# EAGLE board das48 (EAGLE 9.6.2), part 1 of 2
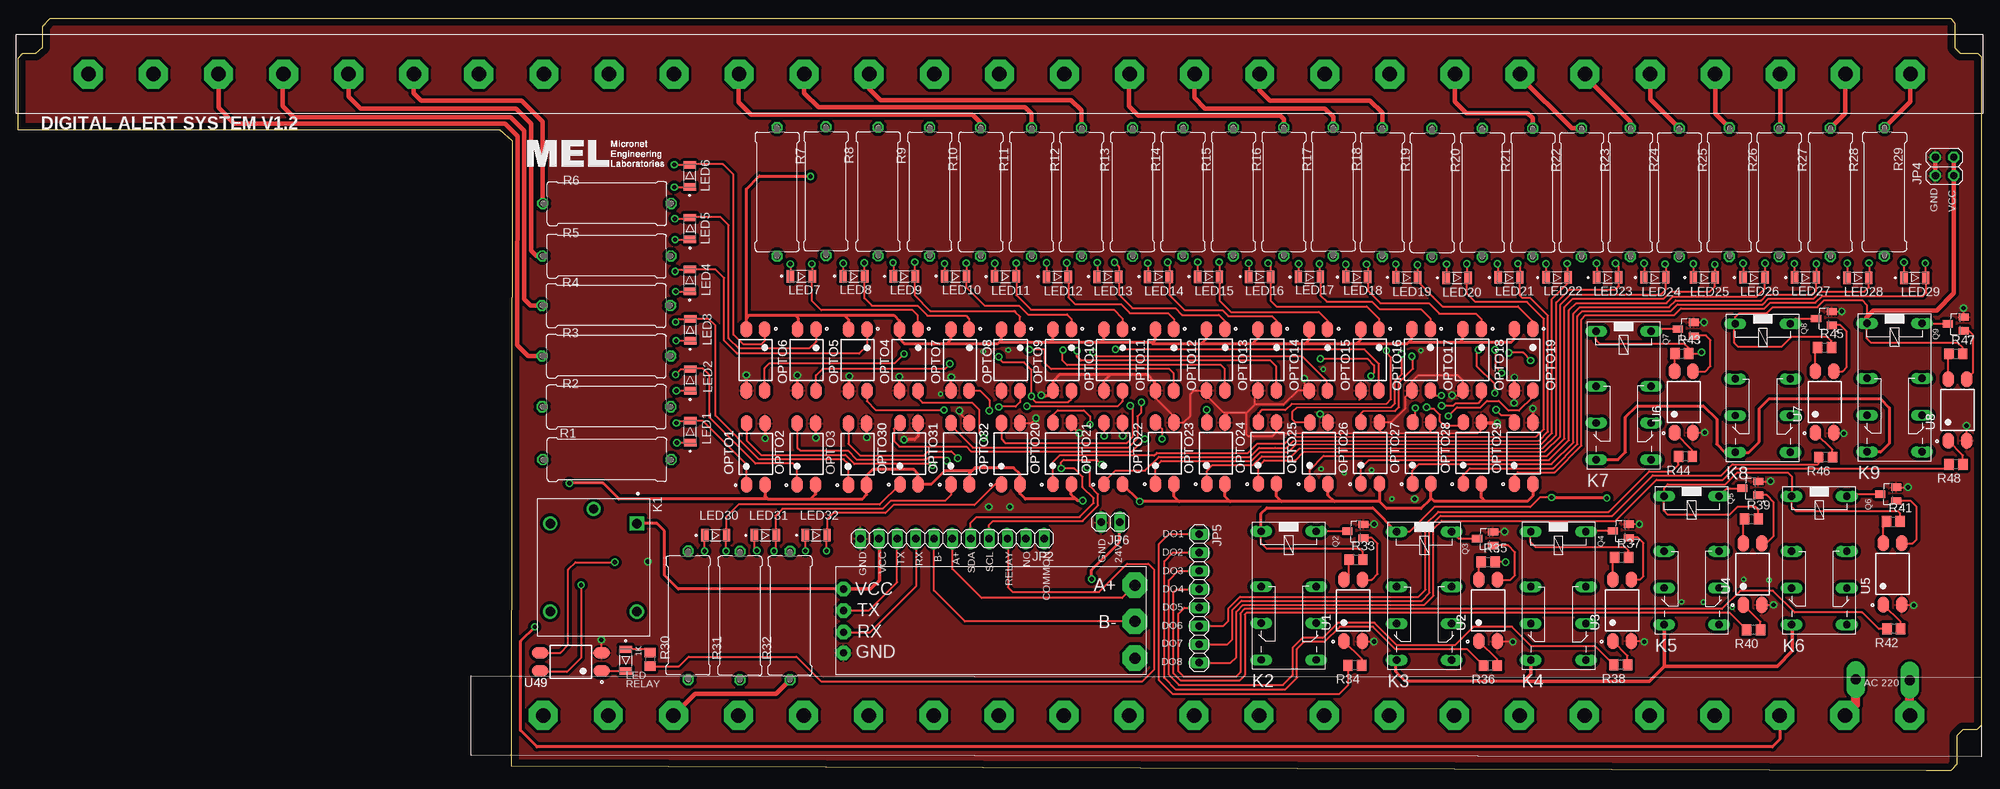
[diagram p0: board, top side]
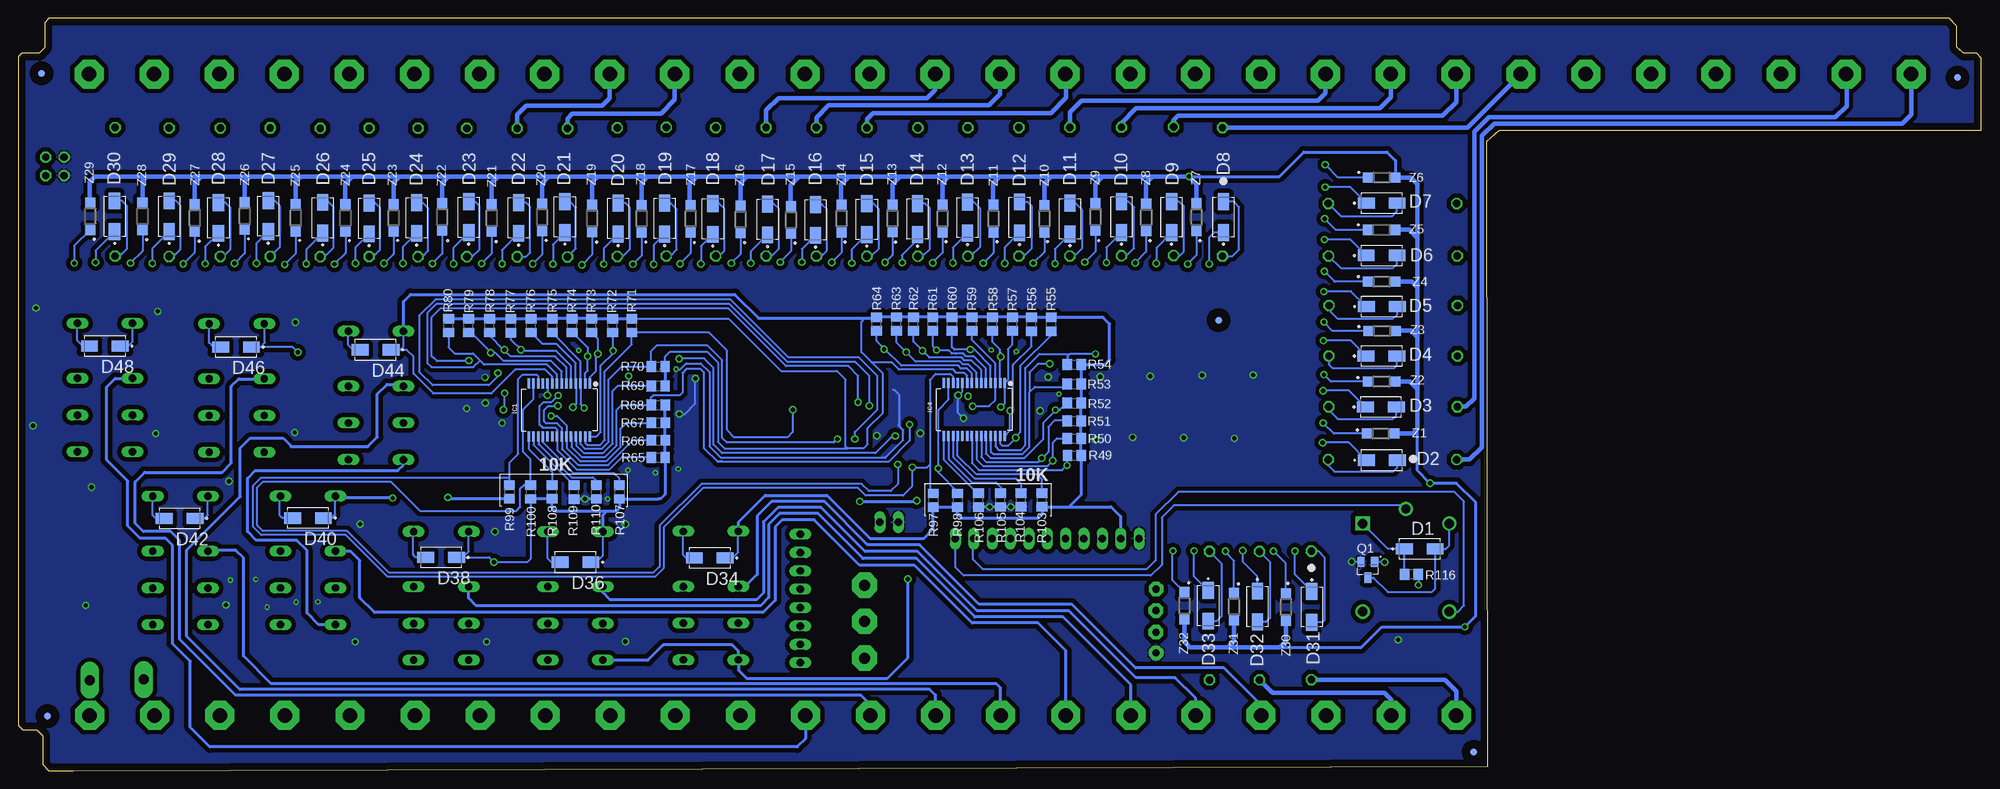
[diagram p1: board, bottom side, seen from below]

Size 271.53 x 104.12 mm. Coordinates in mm from the lower left corner, seen from the top.
Outline: 0.01,88.6 0,97.18 0.01,98.6 0.67,99.26 2.42,99.26 3.4,100.11 3.41,102.98 4.42,104.12 6.94,104.12 264.15,104.12 267.26,104.12 267.87,103.39 267.87,100.03 268.62,99.28 271.02,99.28 271.53,98.77 271.53,96.75 271.53,6.29 270.9,5.67 268.97,5.67 268.14,4.82 268.14,0.86 267.28,0 263.89,0 263.89,0 68.27,0.57 68.37,87.09 66.67,88.6 0.01,88.6
Copper layers (1*16): Top 0.035mm / dielectric 1.5mm / Bottom 0.035mm
Design rules "default *": minimum track width 6mil, minimum drill 0.3mm, track to track 6mil, track to pad 6mil, pad to pad 6mil, via to via 6mil, smd to smd 6mil, copper to edge 40mil, drill to drill 6mil, minimum pad ring 10mil, minimum via ring 8mil, stop-mask expansion 4mil, vias tented up to drill 0mil, thermal gap 10mil
Net classes: 0 default: drill 0.6 mm, clearance 0.3 mm

## Footprints (pad centres in the part's own frame; a part is rotated, then mirrored left to right if it is on the bottom)
DIOM5226X240N = smd 2.33 x 1.55: A 2.135,0; C -2.135,0
LEDC3216X120N = smd 1.01 x 1.73: + -1.51,0; - 1.51,0
HEADER-29P = drill 2 pad 4 octagon: 1 -109,16.5; 2 -100,16.5; 3 -91,16.5; 4 -82,16.5; 5 -73,16.5; 6 -64,16.5; 7 -55,16.5; 8 -46,16.5; 9 -37,16.5; 10 -28,16.5; 11 -19,16.5; 12 -10,16.5; 13 -1,16.5; 14 8,16.5; 15 17,16.5; 16 26,16.5; 17 35,16.5; 18 44,16.5; 19 53,16.5; 20 62,16.5; 21 71,16.5; 22 80,16.5
HEADER-29P' = drill 2 pad 4 octagon: 1 -116.62,5.07; 2 -107.62,5.07; 3 -98.62,5.07; 4 -89.62,5.07; 5 -80.62,5.07; 6 -71.62,5.07; 7 -62.62,5.07; 8 -53.62,5.07; 9 -44.62,5.07; 10 -35.62,5.07; 11 -26.62,5.07; 12 -17.62,5.07; 13 -8.62,5.07; 14 0.38,5.07; 15 9.38,5.07; 16 18.38,5.07; 17 27.38,5.07; 18 36.38,5.07; 19 45.38,5.07; 20 54.38,5.07; 21 63.38,5.07; 22 72.38,5.07; 23 81.38,5.07; 24 90.38,5.07; 25 99.38,5.07; 26 108.38,5.07; 27 117.38,5.07; 28 126.38,5.07; 29 135.38,5.07
SSOP28DB = smd 0.348 x 1.397: 1 -4.225,-3.656; 2 -3.575,-3.656; 3 -2.925,-3.656; 4 -2.275,-3.656; 5 -1.625,-3.656; 6 -0.975,-3.656; 7 -0.325,-3.656; 8 0.325,-3.656; 9 0.975,-3.656; 10 1.625,-3.656; 11 2.275,-3.656; 12 2.925,-3.656; 13 3.575,-3.656; 14 4.225,-3.656; 15 4.225,3.656; 16 3.575,3.656; 17 2.925,3.656; 18 2.275,3.656; 19 1.625,3.656; 20 0.975,3.656; 21 0.325,3.656; 22 -0.325,3.656; 23 -0.975,3.656; 24 -1.625,3.656; 25 -2.275,3.656; 26 -2.925,3.656; 27 -3.575,3.656; 28 -4.225,3.656
1X1-BIGPOGO = drill 1.4 pad 2.54 long: P$1 0,0
1X11 = drill 1.016 long: 1 -12.7,0; 2 -10.16,0; 3 -7.62,0; 4 -5.08,0; 5 -2.54,0; 6 0,0; 7 2.54,0; 8 5.08,0; 9 7.62,0; 10 10.16,0; 11 12.7,0
2X02 = drill 1.016 octagon: 1 -1.27,-1.27; 2 -1.27,1.27; 3 1.27,-1.27; 4 1.27,1.27
1X08 = drill 1.016 long: 1 -8.89,0; 2 -6.35,0; 3 -3.81,0; 4 -1.27,0; 5 1.27,0; 6 3.81,0; 7 6.35,0; 8 8.89,0
1X02 = drill 1.016 long: 1 -1.27,0; 2 1.27,0
RELAY_SRD-05VDC-SL-C = drill 1.32 square: A1 -6.1,6 | drill 1.32: A2 -6.1,-6; NC 6.1,6; NO 6.1,-6 | drill 1.29: COM -8.1,0
351 = drill 1.016 long: 1 -3.81,-3.81; 16 -3.81,3.81; O1 8.89,-3.81; O2 8.89,3.81; P1 3.81,-3.81; P2 3.81,3.81; S1 13.97,-3.81; S2 13.97,3.81
SOT254P975X400-4N = smd 2.25 x 1.6: 1 -4.25,1.27; 2 -4.25,-1.27; 3 4.25,-1.27; 4 4.25,1.27
SOT95P240X120-3N = smd 1 x 1.4: 1 -0.95,-1.1; 2 0.95,-1.1; 3 0,1.1
0617/17 = drill 1.016 octagon: 1 -8.89,0; 2 8.89,0
R0805 = smd 1.3 x 1.5: 1 -0.95,0; 2 0.95,0
TTL-RS485 = drill 1.5 pad 3.5 octagon: A -19.7,-6; B -19.7,-1; P$7 -19.7,4.1 | drill 1 pad 2 octagon: GND 20.6,3.37; RX 20.581,0.505; TX 20.583,-2.493; VCC 20.6,-5.47
FIDUCIAL_1MM = smd 1 x 1: 1 0,0
SOD123 = smd 1.4 x 1.4: A 1.9,0; C -1.9,0

## Placement (x,y rotation side)
D1  US1M-13  [DIOM5226X240N]  77.68,30.68 0 bottom
D2  US1M-13  [DIOM5226X240N]  82.93,42.95 0 bottom
D3  US1M-13  [DIOM5226X240N]  83.06,50.31 0 bottom
D4  US1M-13  [DIOM5226X240N]  82.97,57.38 0 bottom
D5  US1M-13  [DIOM5226X240N]  82.93,64.19 0 bottom
D6  US1M-13  [DIOM5226X240N]  82.95,71.28 0 bottom
D7  US1M-13  [DIOM5226X240N]  82.95,78.53 0 bottom
D8  US1M-13  [DIOM5226X240N]  104.81,76.59 90 bottom
D9  US1M-13  [DIOM5226X240N]  111.99,76.58 90 bottom
D10  US1M-13  [DIOM5226X240N]  118.94,76.59 90 bottom
D11  US1M-13  [DIOM5226X240N]  126.06,76.37 90 bottom
D12  US1M-13  [DIOM5226X240N]  133.02,76.55 90 bottom
D13  US1M-13  [DIOM5226X240N]  140.22,76.51 90 bottom
D14  US1M-13  [DIOM5226X240N]  147.16,76.32 90 bottom
D15  US1M-13  [DIOM5226X240N]  154.16,76.3 90 bottom
D16  US1M-13  [DIOM5226X240N]  161.23,76.2 90 bottom
D17  US1M-13  [DIOM5226X240N]  167.87,76.27 90 bottom
D18  US1M-13  [DIOM5226X240N]  175.46,76.34 90 bottom
D19  US1M-13  [DIOM5226X240N]  182.1,76.39 90 bottom
D20  US1M-13  [DIOM5226X240N]  188.54,76.39 90 bottom
D21  US1M-13  [DIOM5226X240N]  195.91,76.59 90 bottom
D22  US1M-13  [DIOM5226X240N]  202.3,76.48 90 bottom
D23  US1M-13  [DIOM5226X240N]  209.2,76.58 90 bottom
D24  US1M-13  [DIOM5226X240N]  216.41,76.47 90 bottom
D25  US1M-13  [DIOM5226X240N]  222.99,76.39 90 bottom
D26  US1M-13  [DIOM5226X240N]  229.41,76.5 90 bottom
D27  US1M-13  [DIOM5226X240N]  236.92,76.72 90 bottom
D28  US1M-13  [DIOM5226X240N]  243.82,76.46 90 bottom
D29  US1M-13  [DIOM5226X240N]  250.61,76.7 90 bottom
D30  US1M-13  [DIOM5226X240N]  258.19,76.7 90 bottom
D31  US1M-13  [DIOM5226X240N]  92.61,22.66 270 bottom
D32  US1M-13  [DIOM5226X240N]  100.14,22.7 270 bottom
D33  US1M-13  [DIOM5226X240N]  106.94,22.82 270 bottom
D34  US1M-13  [DIOM5226X240N]  175.88,29.42 180 bottom
D36  US1M-13  [DIOM5226X240N]  194.45,28.85 180 bottom
D38  US1M-13  [DIOM5226X240N]  213.02,29.52 180 bottom
D40  US1M-13  [DIOM5226X240N]  231.44,34.94 180 bottom
D42  US1M-13  [DIOM5226X240N]  249.18,34.9 180 bottom
D44  US1M-13  [DIOM5226X240N]  222.09,58.23 180 bottom
D46  US1M-13  [DIOM5226X240N]  241.4,58.61 180 bottom
D48  US1M-13  [DIOM5226X240N]  259.53,58.76 180 bottom
D146  LHN974_RED_LED_1206  [LEDC3216X120N]  84.02,15.28 270 top
HEADER-22P1  [HEADER-29P]  181.64,-8.86 0 top
HEADER-29P1  [HEADER-29P']  126.33,91.31 0 top
IC1  MCP23017SS  [SSOP28DB]  196.68,49.91 180 bottom
IC4  MCP23017SS  [SSOP28DB]  139.3,49.98 180 bottom
JP1  [1X1-BIGPOGO]  261.62,12.52 90 top
JP2  [1X11]  129.21,32.11 180 top
JP3  [1X1-BIGPOGO]  254.15,12.62 90 top
JP4  [2X02]  266.44,83.6 90 top
JP5  [1X08]  163.35,23.82 270 top
JP6  [1X02]  151.07,34.37 180 top
K1  SRD-05VDC-SL-C  [RELAY_SRD-05VDC-SL-C]  79.59,28.1 270 top
K2  351  [351]  175.73,29.29 270 top
K3  351  [351]  194.46,29.25 270 top
K4  351  [351]  213.02,29.26 270 top
K5  351  [351]  231.46,34.17 270 top
K6  351  [351]  249.1,34.16 270 top
K7  351  [351]  222.05,56.99 270 top
K8  351  [351]  241.3,58.03 270 top
K9  351  [351]  259.52,58.08 270 top
LED1  LHN974_RED_LED_1206  [LEDC3216X120N]  92.94,46.89 90 top
LED2  LHN974_RED_LED_1206  [LEDC3216X120N]  92.95,54.06 90 top
LED3  LHN974_RED_LED_1206  [LEDC3216X120N]  92.95,61 90 top
LED4  LHN974_RED_LED_1206  [LEDC3216X120N]  92.89,67.83 90 top
LED5  LHN974_RED_LED_1206  [LEDC3216X120N]  92.92,75.01 90 top
LED6  LHN974_RED_LED_1206  [LEDC3216X120N]  92.88,82.29 90 top
LED7  LHN974_RED_LED_1206  [LEDC3216X120N]  108.31,68.42 0 top
LED8  LHN974_RED_LED_1206  [LEDC3216X120N]  115.61,68.41 0 top
LED9  LHN974_RED_LED_1206  [LEDC3216X120N]  122.56,68.39 0 top
LED10  LHN974_RED_LED_1206  [LEDC3216X120N]  129.65,68.4 0 top
LED11  LHN974_RED_LED_1206  [LEDC3216X120N]  136.56,68.36 0 top
LED12  LHN974_RED_LED_1206  [LEDC3216X120N]  143.74,68.33 0 top
LED13  LHN974_RED_LED_1206  [LEDC3216X120N]  150.73,68.34 0 top
LED14  LHN974_RED_LED_1206  [LEDC3216X120N]  157.7,68.34 0 top
LED15  LHN974_RED_LED_1206  [LEDC3216X120N]  164.64,68.34 0 top
LED16  LHN974_RED_LED_1206  [LEDC3216X120N]  171.72,68.34 0 top
LED17  LHN974_RED_LED_1206  [LEDC3216X120N]  178.59,68.29 0 top
LED18  LHN974_RED_LED_1206  [LEDC3216X120N]  185.15,68.3 0 top
LED19  LHN974_RED_LED_1206  [LEDC3216X120N]  192.07,68.25 0 top
LED20  LHN974_RED_LED_1206  [LEDC3216X120N]  199.02,68.19 0 top
LED21  LHN974_RED_LED_1206  [LEDC3216X120N]  206.18,68.23 0 top
LED22  LHN974_RED_LED_1206  [LEDC3216X120N]  212.85,68.23 0 top
LED23  LHN974_RED_LED_1206  [LEDC3216X120N]  219.83,68.24 0 top
LED24  LHN974_RED_LED_1206  [LEDC3216X120N]  226.37,68.25 0 top
LED25  LHN974_RED_LED_1206  [LEDC3216X120N]  233.19,68.24 0 top
LED26  LHN974_RED_LED_1206  [LEDC3216X120N]  240.08,68.22 0 top
LED27  LHN974_RED_LED_1206  [LEDC3216X120N]  247.18,68.24 0 top
LED28  LHN974_RED_LED_1206  [LEDC3216X120N]  254.45,68.21 0 top
LED29  LHN974_RED_LED_1206  [LEDC3216X120N]  262.33,68.18 0 top
LED30  LHN974_RED_LED_1206  [LEDC3216X120N]  96.48,32.57 0 top
LED31  LHN974_RED_LED_1206  [LEDC3216X120N]  103.35,32.57 0 top
LED32  LHN974_RED_LED_1206  [LEDC3216X120N]  110.38,32.58 0 top
OPTO1  PC817X2NIP0F  [SOT254P975X400-4N]  102.03,43.8 90 top
OPTO2  PC817X2NIP0F  [SOT254P975X400-4N]  109.03,43.81 90 top
OPTO3  PC817X2NIP0F  [SOT254P975X400-4N]  116.09,43.78 90 top
OPTO4  PC817X2NIP0F  [SOT254P975X400-4N]  116.11,56.81 270 top
OPTO5  PC817X2NIP0F  [SOT254P975X400-4N]  109.06,56.81 270 top
OPTO6  PC817X2NIP0F  [SOT254P975X400-4N]  101.99,56.83 270 top
OPTO7  PC817X2NIP0F  [SOT254P975X400-4N]  123.18,56.82 270 top
OPTO8  PC817X2NIP0F  [SOT254P975X400-4N]  130.27,56.82 270 top
OPTO9  PC817X2NIP0F  [SOT254P975X400-4N]  137.31,56.82 270 top
OPTO10  PC817X2NIP0F  [SOT254P975X400-4N]  144.39,56.82 270 top
OPTO11  PC817X2NIP0F  [SOT254P975X400-4N]  151.47,56.82 270 top
OPTO12  PC817X2NIP0F  [SOT254P975X400-4N]  158.55,56.82 270 top
OPTO13  PC817X2NIP0F  [SOT254P975X400-4N]  165.63,56.83 270 top
OPTO14  PC817X2NIP0F  [SOT254P975X400-4N]  172.74,56.83 270 top
OPTO15  PC817X2NIP0F  [SOT254P975X400-4N]  179.83,56.83 270 top
OPTO16  PC817X2NIP0F  [SOT254P975X400-4N]  186.95,56.83 270 top
OPTO17  PC817X2NIP0F  [SOT254P975X400-4N]  194.03,56.84 270 top
OPTO18  PC817X2NIP0F  [SOT254P975X400-4N]  201.11,56.85 270 top
OPTO19  PC817X2NIP0F  [SOT254P975X400-4N]  208.19,56.85 270 top
OPTO20  PC817X2NIP0F  [SOT254P975X400-4N]  144.39,43.88 90 top
OPTO21  PC817X2NIP0F  [SOT254P975X400-4N]  151.47,43.88 90 top
OPTO22  PC817X2NIP0F  [SOT254P975X400-4N]  158.6,43.91 90 top
OPTO23  PC817X2NIP0F  [SOT254P975X400-4N]  165.66,43.92 90 top
OPTO24  PC817X2NIP0F  [SOT254P975X400-4N]  172.78,43.96 90 top
OPTO25  PC817X2NIP0F  [SOT254P975X400-4N]  179.91,43.93 90 top
OPTO26  PC817X2NIP0F  [SOT254P975X400-4N]  187.01,43.96 90 top
OPTO27  PC817X2NIP0F  [SOT254P975X400-4N]  194.14,43.96 90 top
OPTO28  PC817X2NIP0F  [SOT254P975X400-4N]  201.14,43.95 90 top
OPTO29  PC817X2NIP0F  [SOT254P975X400-4N]  208.22,43.92 90 top
OPTO30  PC817X2NIP0F  [SOT254P975X400-4N]  123.22,43.86 90 top
OPTO31  PC817X2NIP0F  [SOT254P975X400-4N]  130.28,43.85 90 top
OPTO32  PC817X2NIP0F  [SOT254P975X400-4N]  137.29,43.84 90 top
Q1  S9013  [SOT95P240X120-3N]  84.87,27.8 180 bottom
Q2  S9013  [SOT95P240X120-3N]  184.96,33.12 90 top
Q3  S9013  [SOT95P240X120-3N]  202.89,32.09 90 top
Q4  S9013  [SOT95P240X120-3N]  221.65,33.16 90 top
Q5  S9013  [SOT95P240X120-3N]  239.58,39.07 90 top
Q6  S9013  [SOT95P240X120-3N]  258.64,38.26 90 top
Q7  S9013  [SOT95P240X120-3N]  230.66,61.09 90 top
Q8  S9013  [SOT95P240X120-3N]  249.76,62.57 90 top
Q9  S9013  [SOT95P240X120-3N]  267.97,61.82 90 top
R1  [0617/17]  81.45,43.04 0 top
R2  [0617/17]  81.37,50.35 0 top
R3  [0617/17]  81.36,57.37 0 top
R4  [0617/17]  81.34,64.35 0 top
R5  [0617/17]  81.39,71.21 0 top
R6  [0617/17]  81.45,78.48 0 top
R7  [0617/17]  104.97,80.08 270 top
R8  [0617/17]  111.72,80.18 270 top
R9  [0617/17]  118.94,80.13 270 top
R10  [0617/17]  126.07,80.11 270 top
R11  [0617/17]  133.13,80.08 270 top
R12  [0617/17]  140.18,80.06 270 top
R13  [0617/17]  147.08,80.05 270 top
R14  [0617/17]  154.14,80.06 270 top
R15  [0617/17]  161.12,80.08 270 top
R16  [0617/17]  168.08,80.1 270 top
R17  [0617/17]  175.05,80.09 270 top
R18  [0617/17]  181.89,80.11 270 top
R19  [0617/17]  188.66,80.05 270 top
R20  [0617/17]  195.56,79.97 270 top
R21  [0617/17]  202.51,79.98 270 top
R22  [0617/17]  209.47,79.98 270 top
R23  [0617/17]  216.23,80 270 top
R24  [0617/17]  222.98,80.01 270 top
R25  [0617/17]  229.74,79.98 270 top
R26  [0617/17]  236.67,80.04 270 top
R27  [0617/17]  243.55,80.03 270 top
R28  [0617/17]  250.66,80.03 270 top
R29  [0617/17]  258.13,80.09 270 top
R30  [0617/17]  92.67,21.48 90 top
R31  [0617/17]  99.84,21.43 90 top
R32  [0617/17]  106.76,21.44 90 top
R33  10k  [R0805]  185.03,29.2 0 top
R34  330  [R0805]  184.87,14.59 180 top
R35  10k  [R0805]  203.3,28.9 0 top
R36  330  [R0805]  203.63,14.55 180 top
R37  10k  [R0805]  221.77,29.53 0 top
R38  330  [R0805]  221.64,14.63 180 top
R39  10k  [R0805]  239.72,34.84 0 top
R40  330  [R0805]  240.02,19.47 180 top
R41  10k  [R0805]  259.33,34.46 0 top
R42  330  [R0805]  259.4,19.6 180 top
R43  10k  [R0805]  230.11,57.71 0 top
R44  330  [R0805]  230.6,43.45 180 top
R45  10k  [R0805]  249.84,58.55 0 top
R46  330  [R0805]  249.98,43.36 180 top
R47  10k  [R0805]  268,57.69 0 top
R48  330  [R0805]  268.02,42.36 180 top
R49  [R0805]  125.45,43.62 0 bottom
R50  [R0805]  125.46,45.96 0 bottom
R51  [R0805]  125.46,48.37 0 bottom
R52  [R0805]  125.46,50.84 0 bottom
R53  [R0805]  125.46,53.49 0 bottom
R54  [R0805]  125.47,56.19 0 bottom
R55  [R0805]  128.64,61.75 90 bottom
R56  [R0805]  131.37,61.77 90 bottom
R57  [R0805]  134.01,61.8 90 bottom
R58  [R0805]  136.76,61.8 90 bottom
R59  [R0805]  139.61,61.8 90 bottom
R60  [R0805]  142.35,61.8 90 bottom
R61  [R0805]  145.02,61.79 90 bottom
R62  [R0805]  147.71,61.8 90 bottom
R63  [R0805]  150.05,61.8 90 bottom
R64  [R0805]  152.79,61.78 90 bottom
R65  [R0805]  183,43.34 0 bottom
R66  [R0805]  182.98,45.72 0 bottom
R67  [R0805]  182.98,48.13 0 bottom
R68  [R0805]  182.97,50.6 0 bottom
R69  [R0805]  183,53.24 0 bottom
R70  [R0805]  183,55.9 0 bottom
R71  [R0805]  186.65,61.57 90 bottom
R72  [R0805]  189.33,61.57 90 bottom
R73  [R0805]  192.2,61.57 90 bottom
R74  [R0805]  194.93,61.57 90 bottom
R75  [R0805]  197.64,61.56 90 bottom
R76  [R0805]  200.56,61.56 90 bottom
R77  [R0805]  203.38,61.55 90 bottom
R78  [R0805]  206.3,61.56 90 bottom
R79  [R0805]  209.21,61.56 90 bottom
R80  [R0805]  211.99,61.56 90 bottom
R97  [R0805]  144.97,37.4 270 bottom
R98  [R0805]  141.59,37.4 270 bottom
R99  [R0805]  203.58,38.56 270 bottom
R100  [R0805]  200.65,38.55 270 bottom
R103  [R0805]  129.91,37.46 90 bottom
R104  [R0805]  132.81,37.45 90 bottom
R105  [R0805]  135.66,37.44 90 bottom
R106  [R0805]  138.7,37.43 90 bottom
R107  [R0805]  188.37,38.55 270 bottom
R108  [R0805]  197.67,38.56 90 bottom
R109  [R0805]  194.65,38.53 90 bottom
R110  [R0805]  191.55,38.54 90 bottom
R115  330  [R0805]  87.4,15.4 270 top
R116  10k  [R0805]  78.84,27.14 180 bottom
TTL-RS1  [TTL-RS485]  134.75,19.65 180 top
U1  PC817X2NIP0F  [SOT254P975X400-4N]  184.66,22.17 90 top
U2  PC817X2NIP0F  [SOT254P975X400-4N]  203.31,22.16 90 top
U3  PC817X2NIP0F  [SOT254P975X400-4N]  221.82,22.18 90 top
U4  PC817X2NIP0F  [SOT254P975X400-4N]  239.9,27.19 90 top
U5  PC817X2NIP0F  [SOT254P975X400-4N]  259.25,27.21 90 top
U6  PC817X2NIP0F  [SOT254P975X400-4N]  230.37,51.01 90 top
U7  PC817X2NIP0F  [SOT254P975X400-4N]  249.86,51 90 top
U8  PC817X2NIP0F  [SOT254P975X400-4N]  268.21,49.9 90 top
U49  PC817X2NIP0F  [SOT254P975X400-4N]  76.44,15.06 180 top
U$1  FIDUCIAL  [FIDUCIAL_1MM]  3.3,95.88 0 bottom
U$2  FIDUCIAL  [FIDUCIAL_1MM]  268.28,96.49 0 bottom
U$3  FIDUCIAL  [FIDUCIAL_1MM]  105.51,62.33 0 bottom
U$4  FIDUCIAL  [FIDUCIAL_1MM]  267.46,7.54 0 bottom
U$5  FIDUCIAL  [FIDUCIAL_1MM]  70.21,2.61 0 bottom
Z1  [SOD123]  83.08,46.63 0 bottom
Z2  [SOD123]  82.96,53.83 0 bottom
Z3  [SOD123]  82.89,60.85 0 bottom
Z4  [SOD123]  82.95,67.66 0 bottom
Z5  [SOD123]  82.97,74.82 0 bottom
Z6  [SOD123]  82.95,82.06 0 bottom
Z7  [SOD123]  108.54,76.58 90 bottom
Z8  [SOD123]  115.51,76.55 90 bottom
Z9  [SOD123]  122.52,76.6 90 bottom
Z10  [SOD123]  129.6,76.37 90 bottom
Z11  [SOD123]  136.65,76.38 90 bottom
Z12  [SOD123]  143.66,76.38 90 bottom
Z13  [SOD123]  150.62,76.38 90 bottom
Z14  [SOD123]  157.67,76.37 90 bottom
Z15  [SOD123]  164.62,76.18 90 bottom
Z16  [SOD123]  171.62,76.26 90 bottom
Z17  [SOD123]  178.5,76.36 90 bottom
Z18  [SOD123]  185.32,76.36 90 bottom
Z19  [SOD123]  192.15,76.39 90 bottom
Z20  [SOD123]  199.07,76.57 90 bottom
Z21  [SOD123]  206.02,76.47 90 bottom
Z22  [SOD123]  212.87,76.59 90 bottom
Z23  [SOD123]  219.61,76.48 90 bottom
Z24  [SOD123]  226.26,76.46 90 bottom
Z25  [SOD123]  233.13,76.51 90 bottom
Z26  [SOD123]  240.18,76.74 90 bottom
Z27  [SOD123]  247.11,76.46 90 bottom
Z28  [SOD123]  254.32,76.71 90 bottom
Z29  [SOD123]  261.58,76.71 90 bottom
Z30  [SOD123]  96.21,22.65 270 bottom
Z31  [SOD123]  103.35,22.7 270 bottom
Z32  [SOD123]  110.24,22.82 270 bottom

## Library data of the parts
D1-D34 D36 D38 D40 D42 D44 D46 D48 = US1M-13; AVAILABILITY: In Stock; DESCRIPTION: Diode Standard 1000 V 1A Surface Mount SMA; MF: Diodes Incorporated; MP: US1M-13; PACKAGE: DO-214AC-214 Diodes Incorporated; PRICE: None; PURCHASE-URL: https://pricing.snapeda.com/search/part/US1M-13/?ref=eda
D146 LED1-LED32 = LHN974_RED_LED_1206; AVAILABILITY: Not in stock; DESCRIPTION: 2.6 V Red LED SMD; MF: Osram; MP: LHN974 RED LED 1206; PACKAGE: None; PRICE: None
HEADER-22P1 = HEADER-22P
HEADER-29P1 = HEADER-29P
IC1 IC4 = adafruit_edited
JP1 JP3 U$1-U$5 = adafruit
JP2 JP4-JP6 = pinhead
K1 = SRD-05VDC-SL-C; AVAILABILITY: Not in stock; DESCRIPTION: 5V Trigger Relay Module For Arduino And Raspberry Pi 5V Trigger Relay Module For Arduino And Raspberry Pi; MF: Songle Relay; MP: SRD-05VDC-SL-C; PACKAGE: None; PRICE: None
K2-K9 = relay; OC_FARNELL: unknown; OC_NEWARK: unknown
OPTO1-OPTO32 U1-U8 U49 = PC817X2NIP0F; AVAILABILITY: Not in stock; DESCRIPTION: Optoisolator Transistor Output 5000Vrms 1 Channel 4-SMD; MF: Sharp Microelectronics; MP: PC817X2NIP0F; PACKAGE: SMD-4 Sharp Microelectronics; PRICE: None
Q1-Q9 = S9013; AVAILABILITY: Not in stock; DESCRIPTION: Bipolar (BJT) Transistor NPN 20V 500mA 625mW Through Hole TO-92-3; MF: JCET; MP: S9013; PACKAGE: SOT-23-3 JCET; PRICE: None
R1-R80 R97-R100 R103-R110 R115 R116 = rcl; SPICEPREFIX: R
TTL-RS1 = TTL-RS485
Z1-Z32 = diode

## Nets
24V+: JP6.1 K2.S1 K3.S1 K4.S1 K5.S1 K6.S1 K7.S1 K8.S1 K9.S1
A+: JP2.6 TTL-RS1.A
B-: JP2.7 TTL-RS1.B
COMM: HEADER-22P1.20 OPTO1.2 OPTO2.2 OPTO3.2 OPTO4.2 OPTO5.2 OPTO6.2 OPTO7.2 OPTO8.2 OPTO9.2 OPTO10.2 OPTO11.2 OPTO12.2 OPTO13.2 OPTO14.2 OPTO15.2 OPTO16.2 OPTO17.2 OPTO18.2 OPTO19.2 OPTO20.2 OPTO21.2 OPTO22.2 OPTO23.2 OPTO24.2 OPTO25.2 OPTO26.2 OPTO27.2 OPTO28.2 OPTO29.2 OPTO30.2 OPTO31.2 OPTO32.2 Z1.A Z2.A Z3.A Z4.A Z5.A Z6.A Z7.A Z8.A Z9.A Z10.A Z11.A Z12.A Z13.A Z14.A Z15.A Z16.A Z17.A Z18.A Z19.A Z20.A Z21.A Z22.A Z23.A Z24.A Z25.A Z26.A Z27.A Z28.A Z29.A Z30.A Z31.A Z32.A
COMMON: JP2.1 K1.COM
DO1: JP5.1 R34.2
DO2: JP5.2 R36.2
DO3: JP5.3 R38.2
DO4: JP5.4 R40.2
DO5: JP5.5 R42.2
DO6: JP5.6 R44.2
DO7: JP5.7 R46.2
DO8: JP5.8 R48.2
GND: IC1.10 IC4.10 JP2.11 JP4.2 JP4.4 JP6.2 OPTO1.3 OPTO2.3 OPTO3.3 OPTO4.3 OPTO5.3 OPTO6.3 OPTO7.3 OPTO8.3 OPTO9.3 OPTO10.3 OPTO11.3 OPTO12.3 OPTO13.3 OPTO14.3 OPTO15.3 OPTO16.3 OPTO17.3 OPTO18.3 OPTO19.3 OPTO20.3 OPTO21.3 OPTO22.3 OPTO23.3 OPTO24.3 OPTO25.3 OPTO26.3 OPTO27.3 OPTO28.3 OPTO29.3 OPTO30.3 OPTO31.3 OPTO32.3 Q1.2 Q2.2 Q3.2 Q4.2 Q5.2 Q6.2 Q7.2 Q8.2 Q9.2 R104.1 R105.1 R106.1 R109.1 R110.1 TTL-RS1.GND U1.2 U2.2 U3.2 U4.2 U5.2 U6.2 U7.2 U8.2 U49.2
N$1: D2.A R1.2
N$2: D2.C LED1.+
N$3: D3.A R2.2
N$4: D3.C LED2.+
N$5: D4.A R3.2
N$6: D4.C LED3.+
N$7: D5.A R4.2
N$8: D5.C LED4.+
N$9: D6.A R5.2
N$10: D6.C LED5.+
N$11: D7.A R6.2
N$12: D7.C LED6.+
N$13: D8.A R7.2
N$14: D8.C LED7.+
N$15: D9.A R8.2
N$16: D9.C LED8.+
N$17: D15.A R14.2
N$18: LED1.- OPTO1.1 Z1.C
N$19: LED13.- OPTO13.1 Z13.C
N$20: D10.A R9.2
N$21: LED14.- OPTO14.1 Z14.C
N$22: D10.C LED9.+
N$23: LED15.- OPTO15.1 Z15.C
N$24: D11.A R10.2
N$25: LED16.- OPTO16.1 Z16.C
N$26: D11.C LED10.+
N$27: LED17.- OPTO17.1 Z17.C
N$28: D12.A R11.2
N$29: LED18.- OPTO18.1 Z18.C
N$30: D12.C LED11.+
N$31: LED19.- OPTO19.1 Z19.C
N$32: LED20.- OPTO20.1 Z20.C
N$33: LED21.- OPTO21.1 Z21.C
N$34: D15.C LED14.+
N$35: LED22.- OPTO22.1 Z22.C
N$36: D13.A R12.2
N$37: LED23.- OPTO23.1 Z23.C
N$38: D13.C LED12.+
N$39: LED24.- OPTO24.1 Z24.C
N$40: D14.A R13.2
N$41: LED25.- OPTO25.1 Z25.C
N$42: D14.C LED13.+
N$43: LED26.- OPTO26.1 Z26.C
N$44: D16.A R15.2
N$45: LED27.- OPTO27.1 Z27.C
N$46: D16.C LED15.+
N$47: LED28.- OPTO28.1 Z28.C
N$48: D17.A R16.2
N$49: LED29.- OPTO29.1 Z29.C
N$50: D17.C LED16.+
N$51: LED30.- OPTO30.1 Z30.C
N$52: D18.A R17.2
N$53: LED31.- OPTO31.1 Z31.C
N$54: D18.C LED17.+
N$55: LED32.- OPTO32.1 Z32.C
N$56: D19.A R18.2
N$57: R34.1 U1.1
N$58: D19.C LED18.+
N$59: D34.A K2.16 Q2.3
N$60: D20.A R19.2
N$61: R36.1 U2.1
N$62: D20.C LED19.+
N$63: R33.1 U1.4
N$64: D32.A R31.2
N$65: Q2.1 U1.3
N$66: D21.A R20.2
N$67: R38.1 U3.1
N$68: D21.C LED20.+
N$69: D36.A K3.16 Q3.3
N$70: R40.1 U4.1
N$71: D22.A R21.2
N$72: R35.1 U2.4
N$73: D22.C LED21.+
N$74: Q3.1 U2.3
N$75: R42.1 U5.1
N$76: D23.A R22.2
N$77: D38.A K4.16 Q4.3
N$78: D23.C LED22.+
N$79: R44.1 U6.1
N$80: D24.A R23.2
N$81: R37.1 U3.4
N$82: D24.C LED23.+
N$83: Q4.1 U3.3
N$84: D25.A R24.2
N$85: R46.1 U7.1
N$86: LED2.- OPTO2.1 Z2.C
N$87: LED3.- OPTO3.1 Z3.C
N$88: LED4.- OPTO4.1 Z4.C
N$89: LED5.- OPTO5.1 Z5.C
N$90: LED6.- OPTO6.1 Z6.C
N$91: LED7.- OPTO7.1 Z7.C
N$92: LED8.- OPTO8.1 Z8.C
N$93: LED9.- OPTO9.1 Z9.C
N$94: LED10.- OPTO10.1 Z10.C
N$95: LED11.- OPTO11.1 Z11.C
N$96: LED12.- OPTO12.1 Z12.C
N$97: D146.- U49.1
N$98: D146.+ R115.1
N$99: R116.1 U49.4
N$100: D40.A K5.16 Q5.3
N$101: D1.A K1.A2 Q1.3
N$102: Q1.1 U49.3
N$103: R48.1 U8.1
N$104: D25.C LED24.+
N$105: D26.A R25.2
N$106: D26.C LED25.+
N$107: IC1.15 R108.2
N$108: IC1.16 R109.2
N$109: IC4.15 R106.2
N$110: IC4.16 R105.2
N$111: IC4.17 R104.2
N$112: R39.1 U4.4
N$113: IC1.17 R110.2
N$114: D27.A R26.2
N$115: D27.C LED26.+
N$116: D28.A R27.2
N$117: D28.C LED27.+
N$118: D32.C LED31.+
N$119: D29.A R28.2
N$120: D29.C LED28.+
N$121: D30.C LED29.+
N$122: D30.A R29.2
N$123: D31.A R30.2
N$124: D31.C LED30.+
N$125: D33.C LED32.+
N$126: D33.A R32.2
N$127: Q5.1 U4.3
N$128: IC4.18 R103.2
N$129: D42.A K6.16 Q6.3
N$130: IC1.18 R107.1
N$131: R41.1 U5.4
N$132: Q6.1 U5.3
N$134: D44.A K7.16 Q7.3
N$135: IC1.20
N$136: IC1.19
N$138: R43.1 U6.4
N$139: Q7.1 U6.3
N$141: D46.A K8.16 Q8.3
N$143: R45.1 U7.4
N$144: Q8.1 U7.3
N$146: D48.A K9.16 Q9.3
N$148: R47.1 U8.4
N$149: Q9.1 U8.3
N$162: HEADER-22P1.21 JP3.P$1
N$163: HEADER-22P1.22 JP1.P$1
NC: K1.NC
NO: JP2.2 K1.NO
OUT1: IC4.21 OPTO1.4 R49.1
OUT2: IC4.22 OPTO2.4 R50.1
OUT3: IC4.23 OPTO3.4 R51.1
OUT4: IC4.24 OPTO4.4 R52.1
OUT5: IC4.25 OPTO5.4 R53.1
OUT6: IC4.26 OPTO6.4 R54.1
OUT7: IC4.27 OPTO7.4 R55.1
OUT8: IC4.28 OPTO8.4 R56.1
OUT9: IC4.1 OPTO9.4 R57.1
OUT10: IC4.2 OPTO10.4 R58.1
OUT11: IC4.3 OPTO11.4 R59.1
OUT12: IC4.4 OPTO12.4 R60.1
OUT13: IC4.5 OPTO13.4 R61.1
OUT14: IC4.6 OPTO14.4 R62.1
OUT15: IC4.7 OPTO15.4 R63.1
OUT16: IC4.8 OPTO16.4 R64.1
OUT17: IC1.21 OPTO17.4 R65.1
OUT18: IC1.22 OPTO18.4 R66.1
OUT19: IC1.23 OPTO19.4 R67.1
OUT20: IC1.24 OPTO20.4 R68.1
OUT21: IC1.25 OPTO21.4 R69.1
OUT22: IC1.26 OPTO22.4 R70.1
OUT23: IC1.27 OPTO23.4 R71.1
OUT24: IC1.28 OPTO24.4 R72.1
OUT25: IC1.1 OPTO25.4 R73.1
OUT26: IC1.2 OPTO26.4 R74.1
OUT27: IC1.3 OPTO27.4 R75.1
OUT28: IC1.4 OPTO28.4 R76.1
OUT29: IC1.5 OPTO29.4 R77.1
OUT30: IC1.6 OPTO30.4 R78.1
OUT31: IC1.7 OPTO31.4 R79.1
OUT32: IC1.8 OPTO32.4 R80.1
P1: HEADER-29P1.1 R1.1
P2: HEADER-29P1.2 R2.1
P3: HEADER-29P1.3 R3.1
P4: HEADER-29P1.4 R4.1
P5: HEADER-29P1.5 R5.1
P6: HEADER-29P1.6 R6.1
P7: HEADER-29P1.7 R7.1
P8: HEADER-29P1.8 R8.1
P9: HEADER-29P1.9 R9.1
P10: HEADER-29P1.10 R10.1
P11: HEADER-29P1.11 R11.1
P12: HEADER-29P1.12 R12.1
P13: HEADER-29P1.13 R13.1
P14: HEADER-29P1.14 R14.1
P15: HEADER-29P1.15 R15.1
P16: HEADER-29P1.16 R16.1
P17: HEADER-29P1.17 R17.1
P18: HEADER-29P1.18 R18.1
P19: HEADER-29P1.19 R19.1
P20: HEADER-29P1.20 R20.1
P21: HEADER-29P1.21 R21.1
P22: HEADER-29P1.22 R22.1
P23: HEADER-29P1.23 R23.1
P24: HEADER-29P1.24 R24.1
P25: HEADER-29P1.25 R25.1
P26: HEADER-29P1.26 R26.1
P27: HEADER-29P1.27 R27.1
P28: HEADER-29P1.28 R28.1
P29: HEADER-29P1.29 R29.1
P30: HEADER-22P1.1 R30.1
P31: HEADER-22P1.2 R31.1
P32: HEADER-22P1.3 R32.1
PDO1: HEADER-22P1.4 K2.P1
PDO2: HEADER-22P1.5 K3.P1
PDO3: HEADER-22P1.6 K4.P1
PDO4: HEADER-22P1.7 K5.P1
PDO5: HEADER-22P1.8 K6.P1
PDO6: HEADER-22P1.9 K7.P1
PDO7: HEADER-22P1.10 K8.P1
PDO8: HEADER-22P1.11 K9.P1
RELAY: JP2.3 R115.2
RX: JP2.8 TTL-RS1.RX
SCL: IC1.12 IC4.12 JP2.4 R97.1 R99.1
SDA: IC1.13 IC4.13 JP2.5 R98.1 R100.1
TX: JP2.9 TTL-RS1.TX
VCC: D1.C D34.C D36.C D38.C D40.C D42.C D44.C D46.C D48.C IC1.9 IC4.9 JP2.10 JP4.1 JP4.3 K1.A1 K2.1 K3.1 K4.1 K5.1 K6.1 K7.1 K8.1 K9.1 R33.2 R35.2 R37.2 R39.2 R41.2 R43.2 R45.2 R47.2 R49.2 R50.2 R51.2 R52.2 R53.2 R54.2 R55.2 R56.2 R57.2 R58.2 R59.2 R60.2 R61.2 R62.2 R63.2 R64.2 R65.2 R66.2 R67.2 R68.2 R69.2 R70.2 R71.2 R72.2 R73.2 R74.2 R75.2 R76.2 R77.2 R78.2 R79.2 R80.2 R97.2 R98.2 R99.2 R100.2 R103.1 R107.2 R108.1 R116.2 TTL-RS1.VCC